# Altium PCB Placa.PcbDoc
Units mm, origin at the board's own origin, x right, y up, seen from the top; angles counter-clockwise.
Board outline 190 x 44.87 mm, 2 copper layers (Top Layer, Bottom Layer); 29 components, 25 nets, 133 pads, 0 vias.
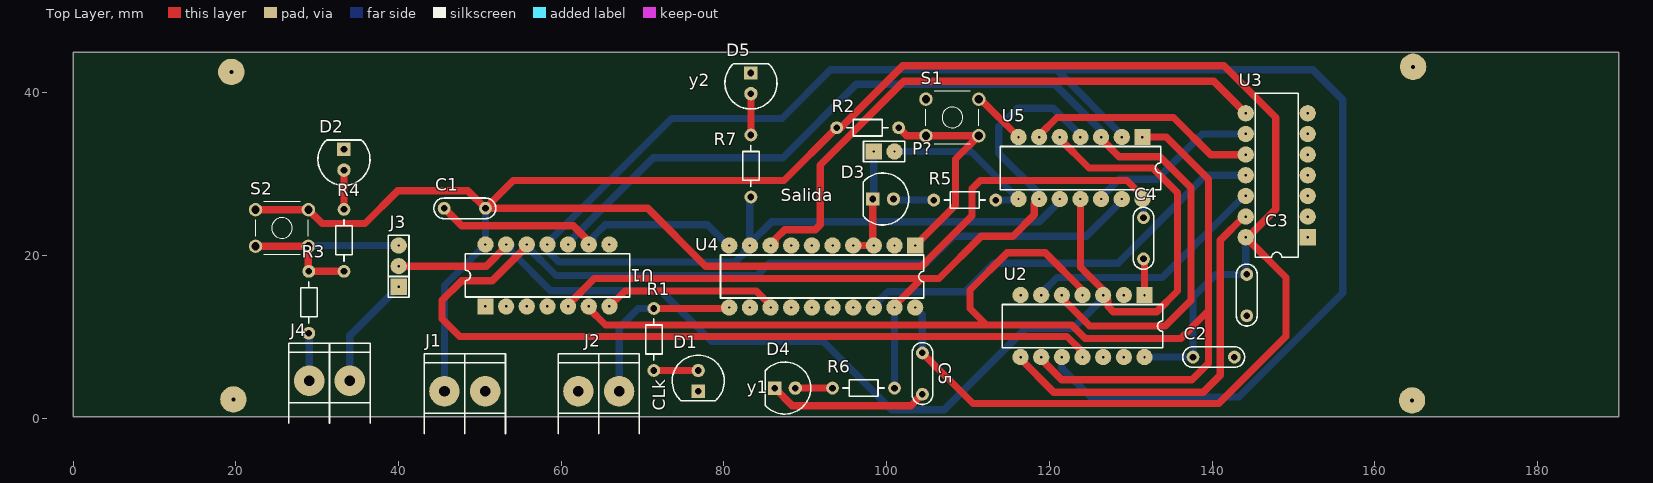
[diagram p0: Top Layer view]
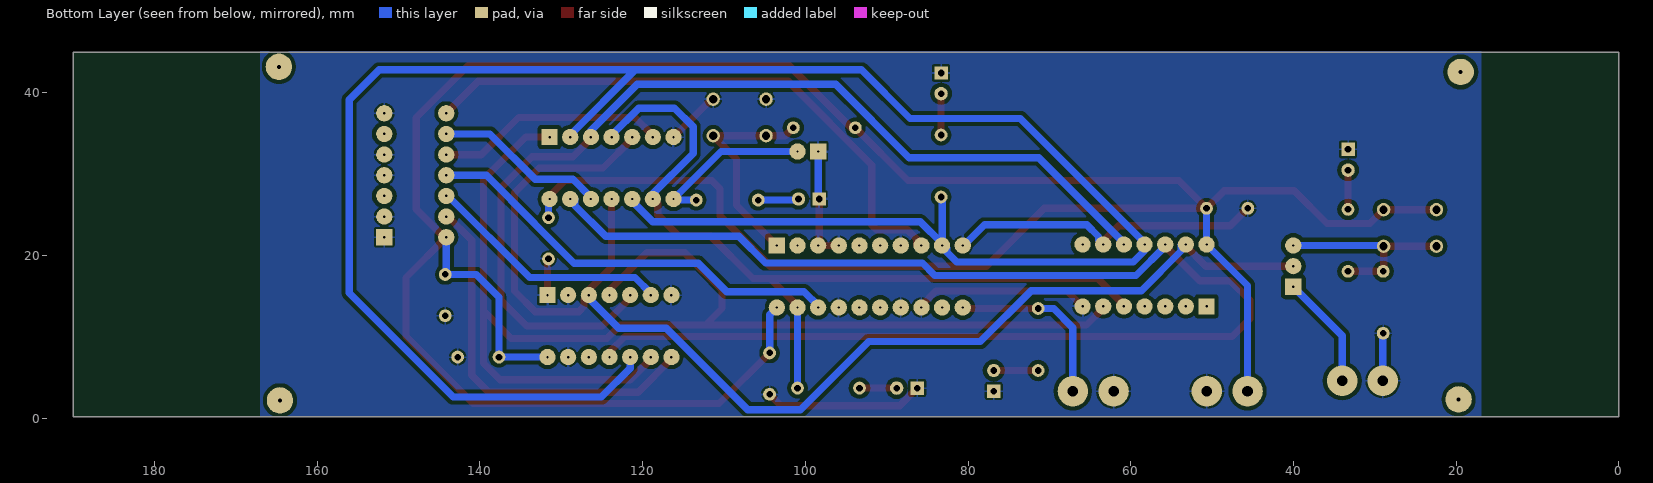
[diagram p1: Bottom Layer view, seen from below]
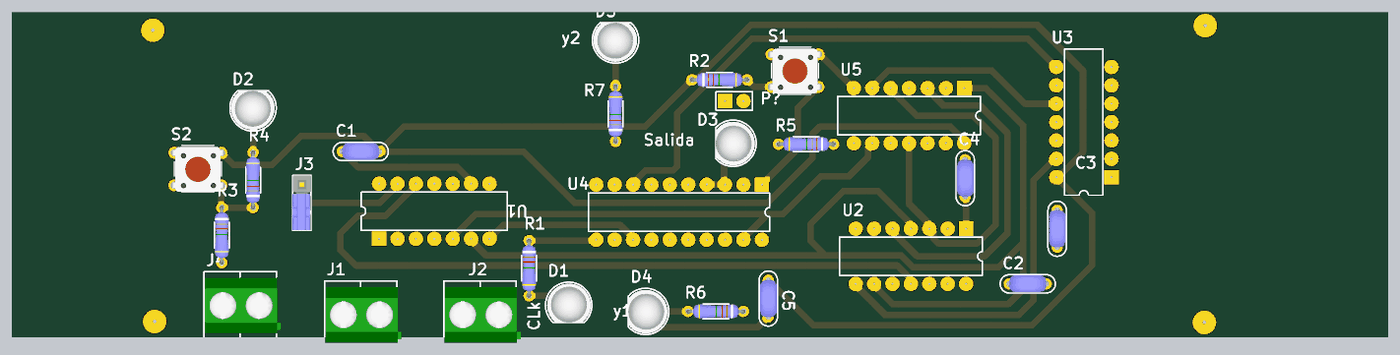
[diagram p2: 3D render of the assembled board from above, using the file's embedded part models]

## Layer stack, top to bottom
Top Solder: solder mask 0.0102, Solder Resist, Dk 3.5
Top Layer: signal copper 0.0356
Dielectric 1: dielectric 0.32, FR-4, Dk 4.8
Bottom Layer: signal copper 0.0356
Bottom Solder: solder mask 0.0102, Solder Resist, Dk 3.5

## Board outline
0,0.127 189.992,0.127 189.992,44.992 190,45 0,45

## Design rules (kind name [scope] priority, off if disabled: settings)
Clearance [All] p1: gap=0.5 ignorepadtopadclearanceinfootprint=FALSE
PolygonConnect [All] p1: connectstyle=Relief reliefconductorwidth=0.254 reliefentries=4 polygonreliefangle="90 Angle" airgapwidth=0.254
RoomDefinition Sheet1 [InComponentClass('Sheet1')] p1: confinementstyle=ConfineIn formatcopy=TRUE lockcomponents=FALSE outline -148.971,-139.319 -98.171,-139.319 -98.171,-113.919 -148.971,-113.919
RoutingVias [All] p1: holewidth=0.3 width=2 viastyle="Through Hole" minholewidth=0.3 minwidth=2 maxholewidth=0.3 maxwidth=2
SolderMaskExpansion [All] p1: expansion=0.102
Width [All] p1: maxlimit=0.9 minlimit=0.9 preferedwidth=0.9
30 further rules are at their usual default settings.

## Components (designator, comment, footprint, x,y, rotation, side; value= is the part's Value field where it differs from the comment)
C1 "100n" CAP200 48.133,25.781 r180 top
C2 "100n" CAP200 140.208,7.493 r180 top
C3 "100n" CAP200 144.272,15.113 r90 top
C4 "100n" CAP200 131.572,22.098 r90 top
C5 "100n" CAP200 104.394,5.461 r90 top
D1 "LED" LED5 76.835,4.572 r270 top
D2 "LED" LED5 33.274,31.75 r90 top
D3 "LED" LED5 99.568,26.924 r180 top
D4 "LED" LED5 87.503,3.683 r180 top
D5 "LED" LED5 83.312,41.148 r90 top
J1 "BORNERA 2" BORNERA2 48.133,3.302 r270 top
J2 "BORNERA 2" BORNERA2 64.603,3.302 r270 top
J3 "JUMPER" JUMPER3 40.005,18.669 r90 top
J4 "BORNERA 2" BORNERA2 31.496,4.572 r270 top
P? "Header 2" HDR1X2 98.425,32.766 r0 top
R1 "1k" RES300 71.374,13.462 r270 top
R2 "220" RES300 93.853,35.687 r0 top
R3 "10k" RES300 28.956,18.034 r270 top
R4 "1k" RES300 33.274,18.034 r90 top
R5 "1k" RES300 113.411,26.797 r180 top
R6 "1k" RES300 100.965,3.683 r180 top
R7 "1k" RES300 83.312,27.178 r90 top
S1 "TACT SWITCH" TACTSWITCH 108.077,36.957 r270 top
S2 "TACT SWITCH" TACTSWITCH 25.654,23.368 r270 top
U1 "SN54ALS04BJ" J014 58.293,17.526 r0 top
U2 "SN74F11N" N014 124.079,11.303 r180 top
U3 "SN54ALS32J" J014 147.955,29.845 r90 top
U4 "SN54ALS273J" J020 92.075,17.399 r180 top
U5 "SN74F11N" N014 123.825,30.734 r180 top

## Footprints (in the part's own frame and the unit in brackets; to place one, negate y for a bottom-side part, rotate by r counter-clockwise, add the part's x,y. Pads: shape width x height; smd on the part's side, far side on the other; paste and mask are expansions set on the pad)
BORNERA2 [mm] "Bornera con Tornillos 5mm separación"
  round 3.75 hole 1.3: 1(0,2.5) 2(0,-2.5)
  silkscreen extent -4.6,-5 5.2,5, body extent -3.76,-4.89 3.94,5.61, height 10
CAP200 [mil]
  round 62 hole 32: 1(-100,0) 2(100,0)
  silkscreen extent -150,-50 150,50, body extent -110,-46 110,44, height 246
HDR1X2 [mm] "Connector; Header; 2 Position"
  rect 2x2 hole 0.3: 1(0,0)
  round 2 hole 0.3: 2(2.54,0)
  silkscreen extent -1.27,-1.27 3.81,1.27
J014 [mm] "DIP; 14 Leads; Row Spacing 7.62 mm; Pitch 2.54 mm"
  rect 2x2 hole 0.3: 1(-7.62,-3.81)
  round 2 hole 0.3: 2(-5.08,-3.81) 3(-2.54,-3.81) 4(0,-3.81) 5(2.54,-3.81) 6(5.08,-3.81) 7(7.62,-3.81) 8(7.62,3.81) 9(5.08,3.81) 10(2.54,3.81) 11(0,3.81) 12(-2.54,3.81) 13(-5.08,3.81) 14(-7.62,3.81)
  silkscreen extent -10.1,-2.65 10.1,2.65
J020 [mm] "DIP; 20 Leads; Row Spacing 7.62 mm; Pitch 2.54 mm"
  rect 2x2 hole 0.3: 1(-11.43,-3.81)
  round 2 hole 0.3: 2(-8.89,-3.81) 3(-6.35,-3.81) 4(-3.81,-3.81) 5(-1.27,-3.81) 6(1.27,-3.81) 7(3.81,-3.81) 8(6.35,-3.81) 9(8.89,-3.81) 10(11.43,-3.81) 11(11.43,3.81) 12(8.89,3.81) 13(6.35,3.81) 14(3.81,3.81) 15(1.27,3.81) 16(-1.27,3.81) 17(-3.81,3.81) 18(-6.35,3.81) 19(-8.89,3.81) 20(-11.43,3.81)
  silkscreen extent -12.5,-2.65 12.5,2.65
JUMPER3 [mm]
  rect 2x2 hole 0.3: 1(-2.54,0)
  round 2 hole 0.3: 2(0,0) 3(2.54,0)
  silkscreen extent -3.81,-1.27 3.81,1.27, body extent -3.81,-1.3 3.81,1.27, height 16.15
LED5 [mil]
  round 65 hole 32: 1(-50,0)
  rect 65x65 hole 32: 2(50,0)
  silkscreen extent -124,-126 96,126, body extent -117,-117 97,120, height 485
N014 [mm] "DIP; 14 Leads; Row Spacing 7.62 mm; Pitch 2.54 mm"
  rect 2x2 hole 0.3: 1(-7.62,-3.81)
  round 2 hole 0.3: 2(-5.08,-3.81) 3(-2.54,-3.81) 4(0,-3.81) 5(2.54,-3.81) 6(5.08,-3.81) 7(7.62,-3.81) 8(7.62,3.81) 9(5.08,3.81) 10(2.54,3.81) 11(0,3.81) 12(-2.54,3.81) 13(-5.08,3.81) 14(-7.62,3.81)
  silkscreen extent -9.85,-2.65 9.85,2.65
RES300 [mil]
  round 62 hole 32: 1(0,0) 2(300,0)
  silkscreen extent 50,-40 250,40, body extent -10,-38 310,38, height 79
TACTSWITCH [mil]
  round 65 hole 40: 1(-88.58,-127.95) 2(-88.58,127.95) 3(88.58,-127.95) 4(88.58,127.95)
  silkscreen extent -128,-128 128,128, body extent -120,-156 124,156, height 276

## Part data
C1 C2 C3 C4 C5: library part CAP
J3: library part JUMPER3
P?: "Header, 2-Pin", LatestRevisionDate=17-Jul-2002, LatestRevisionNote="Re-released for DXP Platform.", Publisher="Altium Limited"
R1 R2 R3 R4 R5 R6 R7: library part RES
U1: "Hex Inverter", ComponentLink1Description="Manufacturer Link", ComponentLink1URL=http://www.ti.com/, ComponentLink2Description=Datasheet, ComponentLink2URL=http://www-s.ti.com/sc/ds/sn54as04.pdf, ComponentLink3Description="Packaging Specification", ComponentLink3URL=http://focus.ti.com/lit/ml/mcer002d/mcer002d.pdf, DatasheetVersion=Dec-1994, LatestRevisionDate=04-Mar-2005, LatestRevisionNote="Stylized 3D Model Added.", PackageDescription="DIP; 14 Leads; Row Spacing 7.62 mm; Pitch 2.54 mm", PackageReference=J014, PackageVersion=Jun-1999, Published=8-Jun-2000, Publisher="Altium Limited"
U2 U5: "Triple 3-Input Positive-AND Gate", ComponentLink1Description="Manufacturer Link", ComponentLink1URL=http://www.ti.com/, ComponentLink2Description=Datasheet, ComponentLink2URL=http://www-s.ti.com/sc/ds/SN74F11.pdf, DatasheetVersion=Oct-1993, LatestRevisionDate=04-Mar-2005, LatestRevisionNote="Stylized 3D Model Added.", PackageDescription="DIP; 14 Leads; Row Spacing 7.62 mm; Pitch 2.54 mm", PackageReference=N014, PackageVersion=Oct-1995, Published=8-Jun-2000, Publisher="Altium Limited"
U3: "Quadruple 2-Input Positive-OR Gate", ComponentLink1Description="Manufacturer Link", ComponentLink1URL=http://www.ti.com/, ComponentLink2Description=Datasheet, ComponentLink2URL=http://www-s.ti.com/sc/ds/sn74als32.pdf, ComponentLink3Description="Packaging Specification", ComponentLink3URL=http://focus.ti.com/lit/ml/mcer002d/mcer002d.pdf, DatasheetVersion=Dec-1994, LatestRevisionDate=04-Mar-2005, LatestRevisionNote="Stylized 3D Model Added.", PackageDescription="DIP; 14 Leads; Row Spacing 7.62 mm; Pitch 2.54 mm", PackageReference=J014, PackageVersion=Jun-1999, Published=8-Jun-2000, Publisher="Altium Limited"
U4: "Octal D-Type Flip-Flop with Clear", ComponentLink1Description="Manufacturer Link", ComponentLink1URL=http://www.ti.com/, ComponentLink2Description=Datasheet, ComponentLink2URL=http://www-s.ti.com/sc/ds/sn74als273.pdf, DatasheetVersion=Dec-1994, LatestRevisionDate=04-Mar-2005, LatestRevisionNote="Stylized 3D Model Added.", PackageDescription="DIP; 20 Leads; Row Spacing 7.62 mm; Pitch 2.54 mm", PackageReference=J020, PackageVersion=Jun-1999, Published=8-Jun-2000, Publisher="Altium Limited"

## Free pads (board coordinates)
  round 3.25 hole 0.5: 2(19.431,42.545) 2(19.685,2.286) 2(164.592,2.159) 2(164.719,43.18)

## Nets (pads, with @x,y where several pads share a name; then routed paths per layer and width w, separated by ;. In a path a pad name is that pad's centre, name@x,y a point inside that pad or via, vN(x,y) a via of type N, cw(c..) or ccw(c..) an arc to the next point about the centre after c; other vN are vias at no path point)
CLK: J2.1 R1.1 U4.11 | length 22.4
  Top Layer w0.9: R1.1 80.518,13.462 U4.11
  Bottom Layer w0.9: J2.1 67.103,11.096 69.469,13.462 R1.1
GND: C1.2 C2.1 C3.1 C4.1 C5.1 D1.2 D2.2 D3.2 D4.2 D5.2 J1.1 J2.2 J4.2 P?.1 R3.2 S1.1 S1.2 U1.7 U1.9 U2.1 U2.2 U2.7 U2.13 U3.1 U3.2 U3.4 U3.5 U3.7 U4.3 U4.4 U4.7 U4.10 U4.13 U4.14 U4.17 U5.7 | length 112
  Top Layer w0.9: C1.2 47.752,23.622 61.468,23.622 63.373,21.717 U1.9 ; U1.7 67.818,15.621 83.947,15.621 85.725,13.843 U4.13 ; D4.2 88.392,1.524 102.997,1.524 C5.1 ; U4.4 U4.3 98.298,21.336 D3.2 ; S1.2 111.542,39.207 U5.7 ; C4.1 131.699,19.431 U2.1
  Bottom Layer w0.9: R3.2 28.996,10.374 J4.2 ; U1.9 63.963,21.926 63.963,22.307 65.405,23.749 77.978,23.749 80.518,21.209 U4.10 ; D3.2 98.425,27.051 P?.1
NetD1_1: D1.1 R1.2 | length 5.5
  Top Layer w0.9: R1.2 D1.1
NetD2_1: D2.1 R4.2 | length 4.8
  Top Layer w0.9: R4.2 D2.1
NetD3_1: D3.1 R5.2 | length 5
  Bottom Layer w0.9: D3.1 100.965,26.797 R5.2
NetD4_1: D4.1 R6.2 | length 4.6
  Top Layer w0.9: D4.1 R6.2
NetD5_1: D5.1 R7.2 | length 5.1
  Top Layer w0.9: R7.2 D5.1
NetJ3_1: J3.1 J4.1 | length 14
  Bottom Layer w0.9: J4.1 33.996,10.12 J3.1
NetJ3_3: J3.3 R3.1 R4.1 S2.3 S2.4 | length 25.2
  Top Layer w0.9: S2.3 S2.4 ; S2.4@28.995,21.209 S2.4 ; R4.1 R3.1 28.904,18.086 S2.4
  Bottom Layer w0.9: S2.4 28.995,21.209 J3.3
NetR5_1: P?.2 R5.1 U5.8 | length 20.5
  Bottom Layer w0.9: P?.2 110.363,32.766 U5.8 116.078,26.797 R5.1
NetU1_6: U1.6 U2.4 U2.9 U5.1 | length 159
  Top Layer w0.9: U1.6 63.373,13.498 65.441,11.43 112.268,11.43 ; U2.9 119.253,7.493 118.999,7.239 121.539,4.699 137.541,4.699 139.573,6.731 139.573,13.208 ; U2.4@124.079,14.895 U2.4 124.079,15.748 119.507,20.32 114.808,20.32 110.236,15.748 110.236,13.462 112.268,11.43 ; U5.1 134.366,34.544 139.573,29.337 139.573,13.208 ; 112.268,11.43 122.757,11.43 124.408,9.779 136.144,9.779 139.573,13.208
NetU1_10: U1.10 U2.5 U5.3 | length 123.5
  Top Layer w0.9: U2.5 121.793,14.859 121.793,14.478 124.968,11.303 134.239,11.303 137.414,14.478 137.414,28.321 133.601,32.134 128.557,32.134 126.365,34.326 U5.3
  Bottom Layer w0.9: U1.10 60.833,21.554 71.283,32.004 87.249,32.004 96.266,41.021 120.65,41.021 126.365,35.306 U5.3
NetU2_6: U2.6 U3.12 | length 30.3
  Bottom Layer w0.9: U2.6 118.999,15.331 120.94,17.272 133.894,17.272 143.927,27.305 U3.12
NetU2_8: U2.8 U3.13 | length 48.3
  Top Layer w0.9: U2.8 116.459,7.275 120.556,3.178 138.941,3.178 141.011,5.248 141.011,21.848 143.927,24.765 U3.13
NetU3_9: U3.9 U5.12 | length 21.2
  Bottom Layer w0.9: U5.12 126.365,27.142 128.56,29.337 133.223,29.337 138.811,34.925 U3.9
NetU3_10: U3.10 U5.6 | length 28.4
  Top Layer w0.9: U5.6 118.745,34.762 120.94,36.957 135.255,36.957 139.827,32.385 U3.10
RST: R2.2 S1.3 S1.4 U4.1 | length 27
  Top Layer w0.9: R2.2 102.453,34.707 S1.3 S1.4 108.458,31.838 108.458,26.162 U4.1
VCC: 
VCCc: C1.1 C2.2 C3.2 C4.2 C5.2 J1.2 R2.1 S2.1 S2.2 U1.14 U2.14 U3.14 U4.20 U5.14 | length 369.7
  Top Layer w0.9: S2.1 S2.2 30.605,23.917 35.855,23.917 39.878,27.94 48.514,27.94 C1.1 ; C5.2 110.617,1.778 140.843,1.778 149.098,10.033 149.098,17.272 U3.14 144.399,22.225 147.828,25.654 147.828,36.957 141.478,43.307 101.981,43.307 94.361,35.687 R2.1 87.376,29.21 54.102,29.21 C1.1 ; U5.14 131.445,27.305 129.54,29.21 111.506,29.21 110.49,28.194 110.49,24.868 105.455,19.833 105.455,19.815 104.309,18.669 77.724,18.669 70.612,25.781 C1.1
  Bottom Layer w0.9: J1.2 45.633,16.296 U1.14 C1.1 ; U4.20 104.394,12.7 C5.2 ; U5.14 131.572,26.797 C4.2 ; U2.14 C2.2 137.668,14.859 140.462,17.653 C3.2 144.145,17.78 U3.14
W: J3.2 U1.13 U2.3 U5.5 U5.11 | length 156.6
  Top Layer w0.9: J3.2 50.764,18.669 U1.13@53.431,21.336 ; U5.5 121.285,34.326 124.877,30.734 132.715,30.734 135.763,27.686 135.763,15.621 133.223,13.081 127.873,13.081 127.209,13.745 127.209,14.523 U2.3 126.619,15.748 123.825,18.542 U5.11
  Bottom Layer w0.9: U1.13@53.431,21.336 53.803,21.336 53.803,20.528 58.665,15.666 72.218,15.666 78.486,9.398 92.202,9.398 100.584,1.016 107.061,1.016 117.094,11.049 122.936,11.049 126.619,14.732 U2.3
wneg: U1.12 U2.11 U5.13 | length 176.2
  Top Layer w0.9: U1.12 55.753,21.118 51.526,16.891 47.752,16.891 45.339,14.478 45.339,12.192 47.501,10.03 122.177,10.03 124.079,8.128 U2.11
  Bottom Layer w0.9: U1.12 55.753,21.118 59.345,17.526 84.074,17.526 85.598,19.05 104.902,19.05 108.204,22.352 124.551,22.352 128.315,26.116 U5.13@128.315,26.334 ; U5.13@128.315,26.924 U5.13@128.315,26.334 ; U5.13 U5.13@128.315,26.334
y1: R6.1 U1.5 U4.19 U5.4 U5.9 | length 103.7
  Top Layer w0.9: U1.5 60.833,13.934 64.044,17.145 104.303,17.145 ; U4.19 100.965,13.807 104.303,17.145 ; U5.9 118.155,26.334 118.155,24.974 115.533,22.352 111.633,22.352 106.426,17.145 104.303,17.145
  Bottom Layer w0.9: R6.1 U4.19 ; U5.9@119.126,27.305 U5.9 118.745,27.559 113.792,32.512 113.792,35.814 116.078,38.1 120.487,38.1 123.825,34.762 U5.4 U5.4@123.825,34.036
y2: R7.1 U1.11 U2.10 U4.9 U5.2 U5.10 | length 260.2
  Bottom Layer w0.9: R7.1 83.185,27.051 U4.9@83.185,21.463 ; U5.10 121.285,26.67 118.745,24.13 85.852,24.13 U4.9@83.185,21.463 ; U2.10 121.539,6.133 125.095,2.577 143.293,2.577 156.083,15.367 156.083,39.116 152.4,42.799 120.904,42.799 ; U5.2 128.905,34.798 120.904,42.799 ; U4.9@83.185,21.463 U4.9 82.931,21.209 82.595,20.873 82.595,20.401 81.371,19.177 59.69,19.177 58.293,20.574 U1.11 58.293,21.554 73.569,36.83 87.122,36.83 93.091,42.799 120.904,42.799
Y11: U3.11 U4.18 | length 52.9
  Top Layer w0.9: U3.11@143.891,29.845 U3.11
  Bottom Layer w0.9: U4.18 98.425,13.807 100.157,15.539 109.646,15.539 113.154,19.047 128.438,19.047 133.309,23.918 133.309,23.962 139.192,29.845 U3.11
Y22: U3.8 U4.8 | length 73.2
  Top Layer w0.9: U4.8 86.315,21.209 86.315,22.017 87.457,23.159 91.231,23.159 91.821,23.749 91.821,31.115 102.108,41.402 140.208,41.402 U3.8
pads on no net: U1.1 U1.2 U1.3 U1.4 U1.8 U2.12 U3.3 U3.6 U4.2 U4.5 U4.6 U4.12 U4.15 U4.16
copper on no net: | length 0.2
  Bottom Layer w0.9: 100.965,20.991 100.965,21.209

## Polygon pours and split planes (outlines as drawn)
GND on Bottom Layer "Bottom Layer-No Net" (solid, pour order 2): 16.891,0.127 167.005,0.127 167.005,45.085 16.891,45.085

## Silkscreen, mask and mechanical layers (free items; w line width, h text height)
Top Overlay:
  text "y2" at 75.692,40.767 h1.52
  text "Salida" at 86.995,26.67 h1.52
  text "y1" at 82.804,3.048 h1.52
  text "CLk" at 72.771,0.889 h1.52 r90